# Allegro board TEST.brd
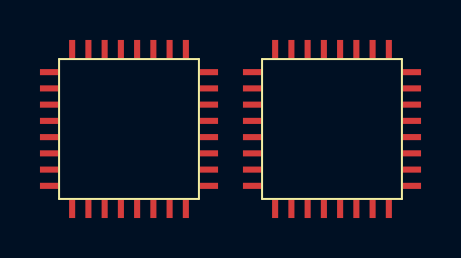
[diagram p0: board, top side]
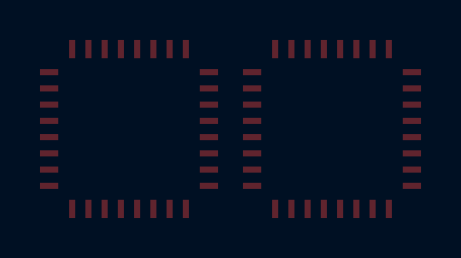
[diagram p1: board, bottom side, seen from below]

No outline. copper layers: TOP, BOTTOM. Coordinates in mm from the lowest, leftmost part position.

## Placement (name value [footprint] x y rotation side)
IC1  ATmega48-MLF32  [ATMEGA328P]  0 0 0 top
IC2  ATmega48-MLF32  [ATMEGA328P]  10.16 0 0 top

## Library data of the parts
IC1 IC2 = ATmega48-MLF32_0

## Footprints (pads in the part's own frame, mm; a bottom-side part is the same pattern mirrored in y, then rotated)
ATMEGA328P
  rect 0.914x0.305 smd: 1(-4,2.846) 2(-4,2.032) 3(-4,1.219) 4(-4,0.406) 5(-4,-0.407) 6(-4,-1.22) 7(-4,-2.032) 8(-4,-2.845) 17(4,-2.846) 18(4,-2.032) 19(4,-1.219) 20(4,-0.406) 21(4,0.407) 22(4,1.22) 23(4,2.032) 24(4,2.845)
  rect 0.305x0.914 smd: 9(-2.846,-4) 10(-2.032,-4) 11(-1.219,-4) 12(-0.406,-4) 13(0.407,-4) 14(1.22,-4) 15(2.032,-4) 16(2.845,-4) 25(2.846,4) 26(2.032,4) 27(1.219,4) 28(0.406,4) 29(-0.407,4) 30(-1.22,4) 31(-2.032,4) 32(-2.845,4)

## Nets
AGND: IC2.21(AGND)
AVCC: IC2.18(AVCC)
GND: IC1.4(GND#4) IC1.6(GND#6)
VCC: IC1.3(VCC#3) IC1.5(VCC#5)
N00586: IC1.24(PC1) IC2.1(PD3)
N00588: IC1.23(PC0) IC2.2(PD4)
N00590: IC1.22(ADC7) IC2.3(VCC#3)
N00592: IC1.21(AGND) IC2.4(GND#4)
N00594: IC1.18(AVCC) IC2.7(PB6)
N00596: IC1.17(PB5) IC2.8(PB7)
N00598: IC1.19(ADC6) IC2.6(GND#6)
N00600: IC1.20(AREF) IC2.5(VCC#5)

Pads without a net: IC1 1 2 7 8 9 10 11 12 13 14 15 16 25 26 27 28 29 30 31 32; IC2 9 10 11 12 13 14 15 16 17 19 20 22 23 24 25 26 27 28 29 30 31 32
